# Altium PCB machdongho.PcbDoc
Units mm, origin at the board's own origin, x right, y up, seen from the top; angles counter-clockwise.
Board outline 65.41 x 52.07 mm, 2 copper layers (Top Layer, Bottom Layer); 46 components, 62 nets, 189 pads, 31 vias.
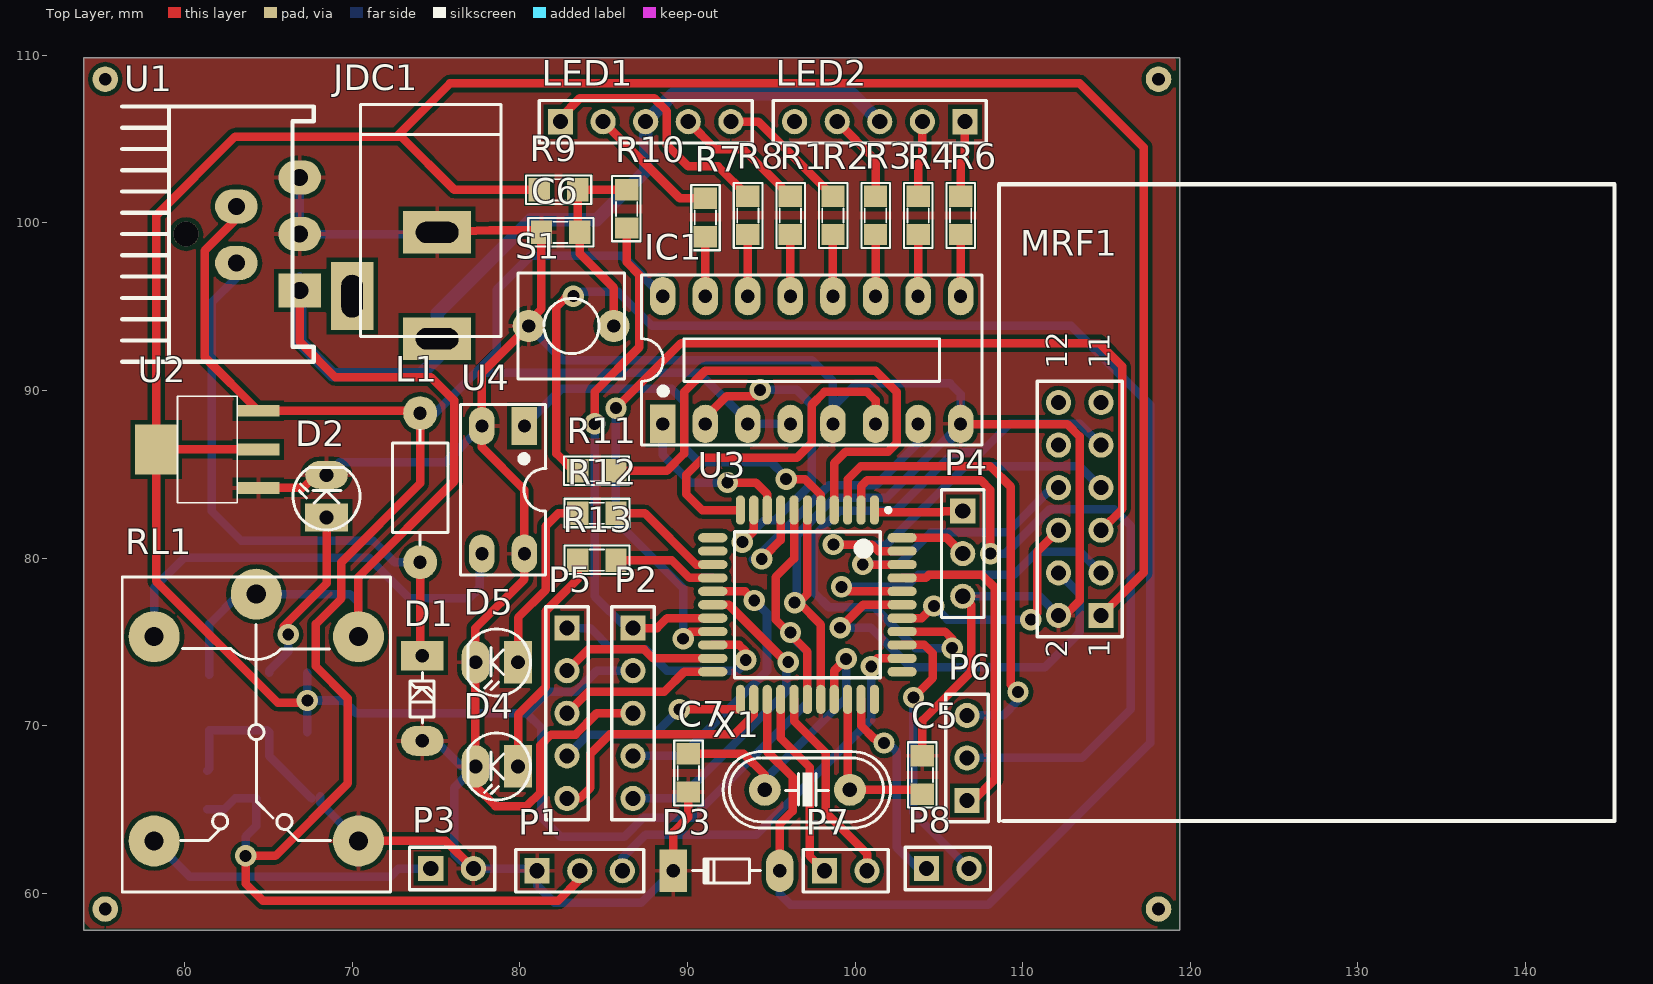
[diagram p0: Top Layer view]
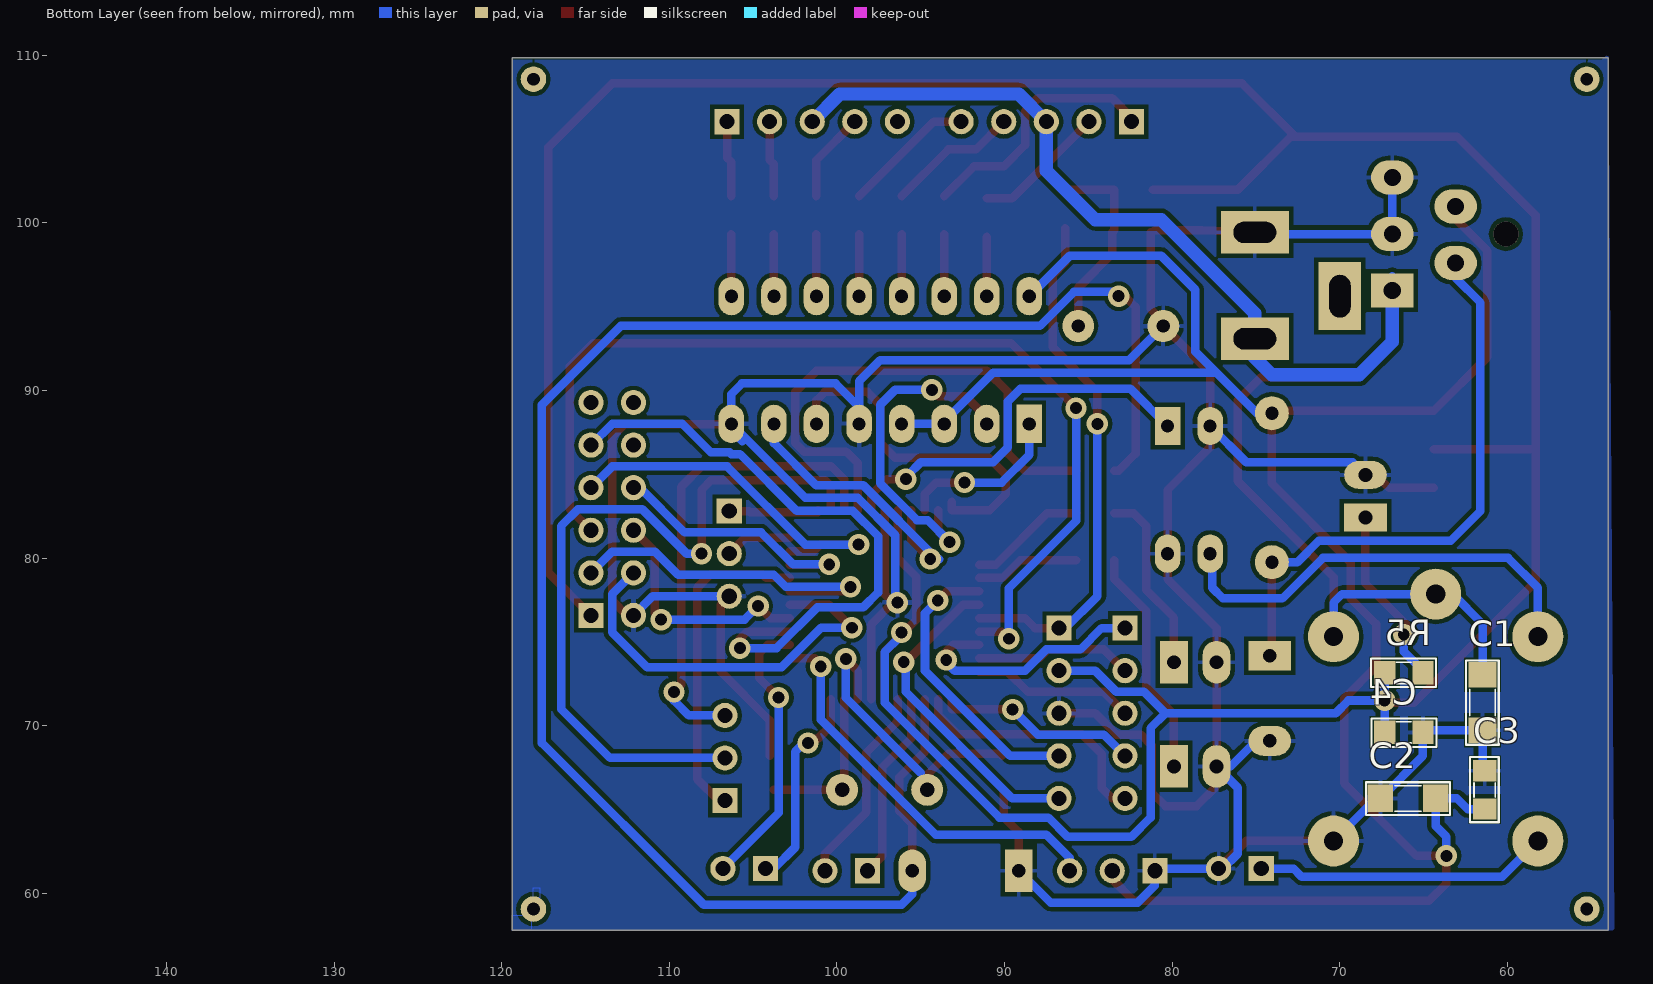
[diagram p1: Bottom Layer view, seen from below]
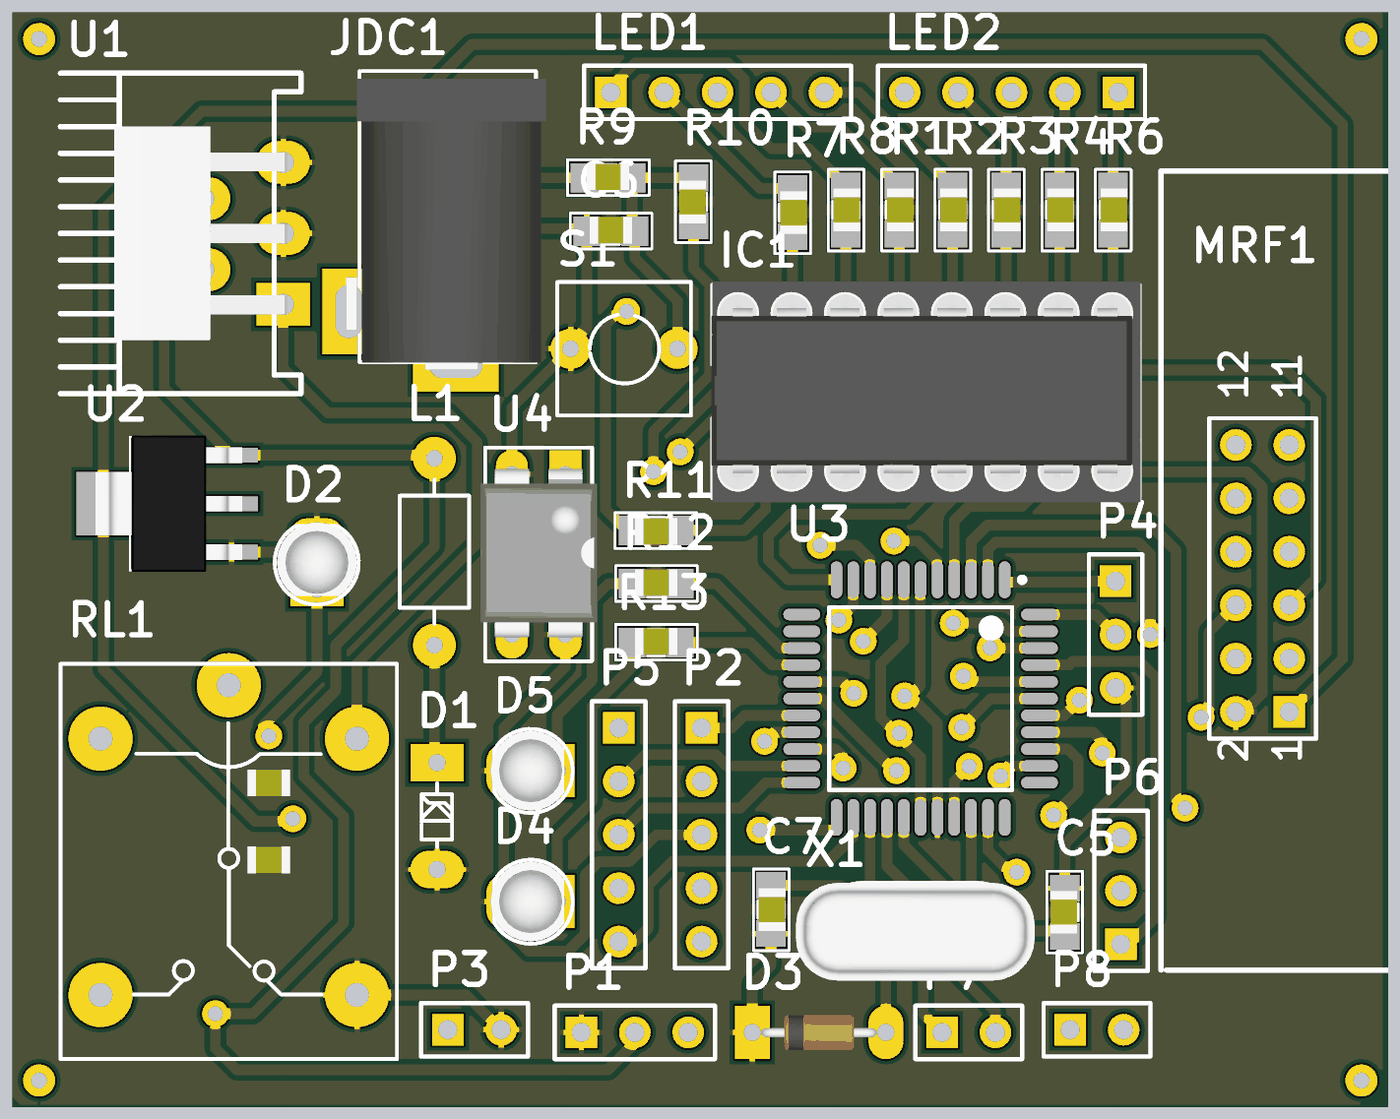
[diagram p2: 3D render of the assembled board from above, using the file's embedded part models]
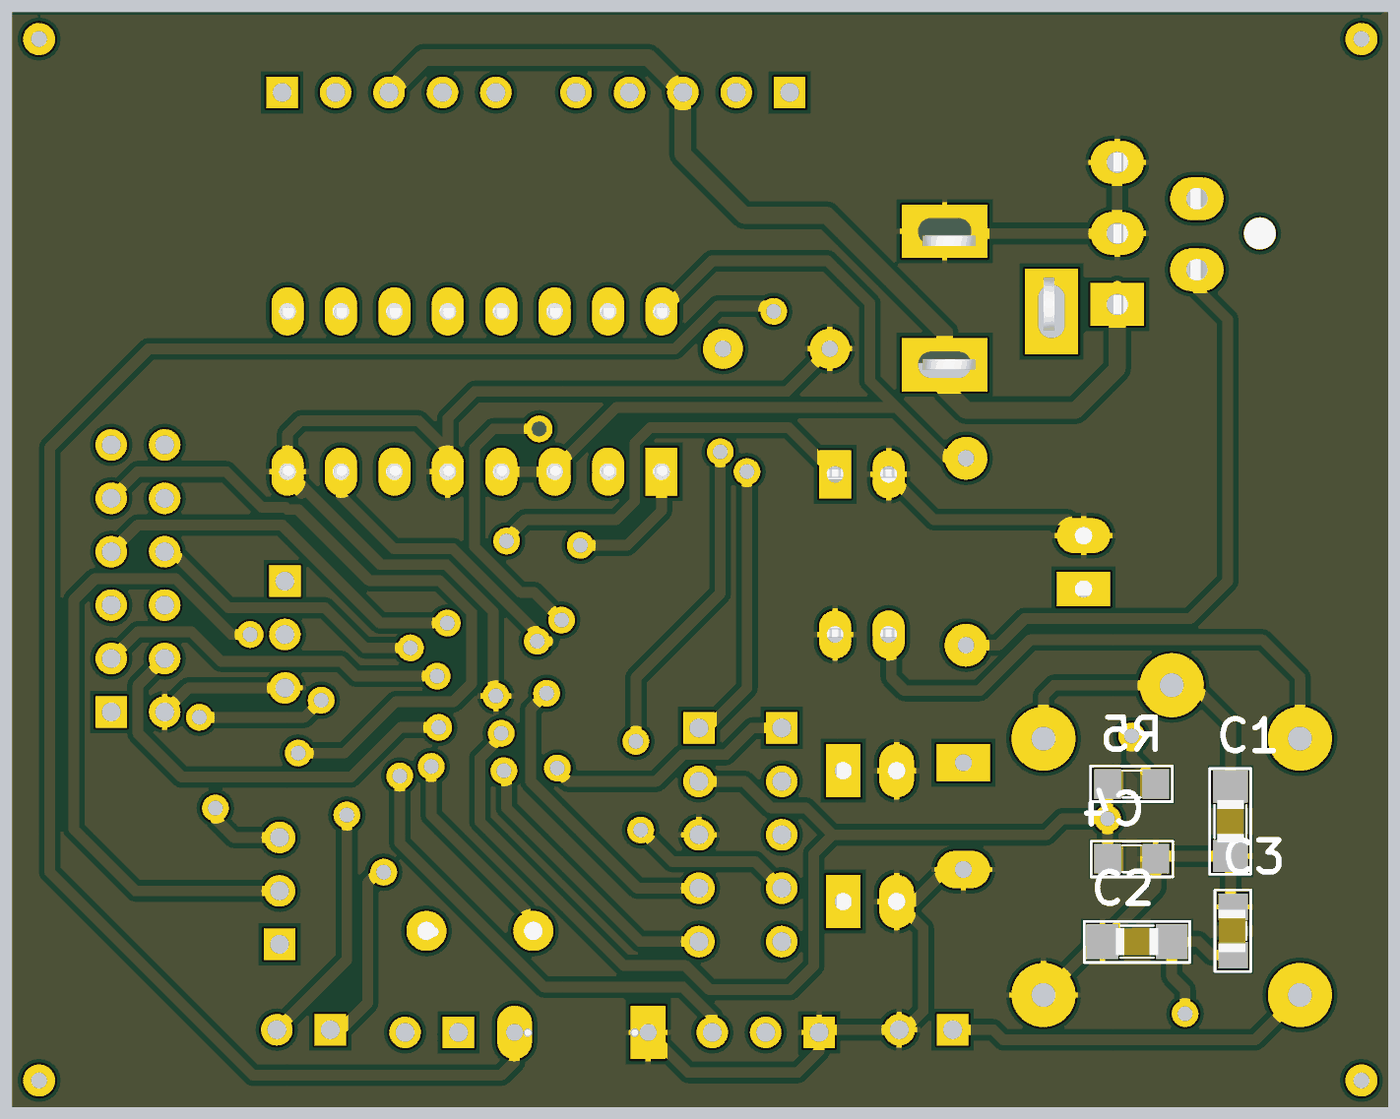
[diagram p3: 3D render of the assembled board from below, using the file's embedded part models]

## Layer stack, top to bottom
Top Solder: solder mask 0.0102, Solder Resist, Dk 3.5
Top Layer: signal copper 0.0356
Dielectric1: dielectric 0.32, FR-4, Dk 4.8
Bottom Layer: signal copper 0.0356
Bottom Solder: solder mask 0.0102, Solder Resist, Dk 3.5

## Board outline
53.975,109.855 53.975,57.785 119.38,57.785 119.38,109.855

## Design rules (kind name [scope] priority, off if disabled: settings)
Clearance [All] p1: gap=0.254
PolygonConnect [All] p1: connectstyle=Relief reliefconductorwidth=0.254 reliefentries=4 polygonreliefangle="90 Angle" airgapwidth=0.254
RoomDefinition machdongho [InComponentClass('machdongho')] p1: confinementstyle=ConfineIn formatcopy=TRUE lockcomponents=FALSE outline 178.943,26.924 503.301,26.924 503.301,68.072 178.943,68.072
RoutingVias [All] p1: holewidth=0.711 width=1.27 viastyle="Through Hole" minholewidth=0.711 minwidth=1.27 maxholewidth=0.711 maxwidth=1.27
SilkToSolderMaskClearance SilkscreenOverComponentPads [IsPad] p1: minsilkscreentomaskgap=0.254 clearancetoexposedcopper=TRUE
SolderMaskExpansion [All] p1: expansion=0.102
UnpouredPolygon [All] p1: allowunpoured=FALSE
Width Width_1 [All] p1: maxlimit=0.508 minlimit=0.508 preferedwidth=0.508
Width [InNet('12V')] p2: maxlimit=0.762 minlimit=0.762 preferedwidth=0.762
28 further rules are at their usual default settings.

## Components (designator, comment, footprint, x,y, rotation, side; value= is the part's Value field where it differs from the comment)
C1 "Cap" "SMD Capacistor 1206" 60.452,68.834 r90 bottom
C2 "Cap Pol1" "SMD Capacistor 1206" 63.373,66.675 r0 bottom
C3 "Cap" SM-0805 61.341,66.167 r270 bottom
C4 "Cap" SM-0805 66.167,69.596 r0 bottom
C5 "" SM-0805 104.013,67.056 r270 top
C6 "Cap" SM-0805 82.423,99.441 r180 top
C7 "" SM-0805 90.043,67.183 r90 top
D1 "1N5822" DZ0.5A 74.168,69.088 r270 top
D2 "LED0" LED-3 68.453,82.423 r90 top
D3 "Diode" D0.5A 92.329,61.341 r0 top
D4 "" LED-3 79.883,67.564 r180 top
D5 "" LED-3 79.883,73.787 r180 top
IC1 "7447" DIP16/W0.3 88.519,88.011 r0 top
JDC1 "Jac DC" DC-IN 72.517,96.266 r270 top
L1 "100mH" L/0.4 74.041,79.756 r90 top
LED1 "Led7" HDR1X5 82.423,106.045 r0 top
LED2 "Led7" HDR1X5 106.553,106.045 r180 top
MRF1 "Header 6X2" MRF24J40MB_board_mini 110.871,75.311 r0 top
P1 "DONG CO" HDR1X3 81.026,61.341 r0 top
P2 "MACH NAP" HDR1X5 86.741,75.819 r270 top
P3 "Lamp" HDR1X2 74.676,61.468 r0 top
P4 "UART" HDR1X3 106.426,82.804 r270 top
P5 "Header 5" HDR1X5 82.804,75.819 r270 top
P6 "Header 3" HDR1X3 106.68,65.532 r90 top
P7 "Header 2" HDR1X2 98.171,61.341 r0 top
P8 "Header 2" HDR1X2 104.267,61.468 r0 top
R1 "2.2K" SM-0805 96.139,100.457 r90 top
R2 "2.2K" SM-0805 98.679,100.457 r90 top
R3 "2.2K" SM-0805 101.219,100.457 r90 top
R4 "2.2K" SM-0805 103.759,100.457 r90 top
R5 "Res1" SM-0805 66.167,73.152 r180 bottom
R6 "2.2K" SM-0805 106.299,100.457 r90 top
R7 "2.2K" SM-0805 91.059,100.33 r90 top
R8 "2.2K" SM-0805 93.599,100.457 r90 top
R9 "" SM-0805 82.296,101.981 r180 top
R10 "Res Semi" SM-0805 86.36,100.838 r270 top
R11 "Res1" SM-0805 84.582,85.217 r0 top
R12 "Res1" SM-0805 84.582,82.677 r180 top
R13 "Res1" SM-0805 84.582,79.883 r180 top
RL1 "Relay 10A/12V" RL_SPDT_10A 64.262,77.851 r270 top
S1 "SW-PB" SW2 85.598,93.853 r180 top
U1 "LM2576T-5.0" LM2576t 62.611,99.314 r90 top
U2 "LM1117-3.3V" LM1117-SOP 63.119,86.487 r90 top
U3 "PIC18F46K20-I/PT" TQFP-PT44_N 97.155,77.216 r270 top
U4 "Opto TRIAC" DIP4/W0.3 80.264,87.884 r180 top
X1 "4Mhz" XT2 97.155,66.167 r0 top

## Footprints (in the part's own frame and the unit in brackets; to place one, negate y for a bottom-side part, rotate by r counter-clockwise, add the part's x,y. Pads: shape width x height; smd on the part's side, far side on the other; paste and mask are expansions set on the pad)
D0.5A [mil] "Diode muoi, W 80mil, L 300mil"
  oval 65x100 hole 32: 1(125,0)
  rect 65x100 hole 32: 2(-125,0)
  silkscreen extent -80,-30 80,28, body extent -108,-33 108,32, height 61
DC-IN [mil] "Jac DC input"
  rect 100x160 hole 50 slot 100 at 90 deg: 1(125,100) 2(-125,100)
  rect 160x100 hole 50 slot 100 at 0 deg: 3(25,-100)
  silkscreen extent -425,-80 120,250, body extent -410,-105 134,269, height 434
DIP4/W0.3 [mil] "4 PIN, W 300mil, Pin to pin 100mil"
  rect 60x90 hole 31: 1(0,0)
  oval 60x90 hole 31: 2(100,0) 3(100,300) 4(0,300)
  silkscreen extent -50,-50 150,350, body extent -59,-10 159,305, height 170
DIP16/W0.3 [mil] "16 PIN, W 300mil, Pin to pin 100mil"
  rect 60x90 hole 31: 1(0,0)
  oval 60x90 hole 31: 2(100,0) 3(200,0) 4(300,0) 5(400,0) 6(500,0) 7(600,0) 8(700,0) 9(700,300) 10(600,300) 11(500,300) 12(400,300) 13(300,300) 14(200,300) 15(100,300) 16(0,300)
  silkscreen extent -50,-50 750,350, body extent -52,-57 752,356, height 299
DZ0.5A [mil] "Diode Zenner, W 80mil, L 300mil"
  oval 70x100 hole 32: 1(0,0)
  rect 70x100 hole 32: 2(-200,0)
  silkscreen extent -161,-29 -42,28
HDR1X2 [mm] "Connector; Header; 2 Position"
  rect 1.5x1.5 hole 0.9: 1(0,0)
  round 1.5 hole 0.9: 2(2.54,0)
  silkscreen extent -1.27,-1.27 3.81,1.27
HDR1X3 [mm] "Connector; Header; 3 Position"
  rect 1.5x1.5 hole 0.9: 1(0,0)
  round 1.5 hole 0.9: 2(2.54,0) 3(5.08,0)
  silkscreen extent -1.27,-1.27 6.35,1.27
HDR1X5 [mm] "Connector; Header; 5 Position"
  rect 1.5x1.5 hole 0.9: 1(0,0)
  round 1.5 hole 0.9: 2(2.54,0) 3(5.08,0) 4(7.62,0) 5(10.16,0)
  silkscreen extent -1.27,-1.27 11.43,1.27
L/0.4 [mil] "Inductor , 2 Pin, L 350mil, W 150 mil"
  round 80 hole 31: 1(0,0) 2(350,0)
  silkscreen extent 40,-65 310,65
LED-3 [mil] "LED 2 PIN, 3ly Only colour"
  rect 65x100 hole 32: 1(0,0)
  oval 65x100 hole 32: 2(100,0)
  silkscreen extent -29,-78 118,79, body extent -13,-75 125,75, height 217
LM1117-SOP [mm]
  rect 0.7x2.54 smd: 1(-2.3,-1.27) 2(0,-1.27) 3(2.3,-1.27)
  rect 3x2.54 smd: 2(0,4.826)
  silkscreen extent -3.18,0 3.17,3.56, body extent -3.25,-1.78 3.25,5.18, height 1.68
LM2576t [mil]
  rect 80x100 hole 40: 1(-132,-167.09)
  oval 80x100 hole 40: 2(-67,-18) 3(1,-167) 4(66,-18) 5(134,-167)
  round 59.06 hole 59.06: ""(1,100)
  silkscreen extent -299,-200 301,250, body extent -199,-175 201,150, height 859
MRF24J40MB_board_mini [mm]
  rect 1.5x1.5 hole 0.9: 1(3.81,1.27)
  round 1.5 hole 0.9: 2(1.27,1.27) 3(3.81,3.81) 4(1.27,3.81) 5(3.81,6.35) 6(1.27,6.35) 7(3.81,8.89) 8(1.27,8.89) 9(3.81,11.43) 10(1.27,11.43) 11(3.81,13.97) 12(1.27,13.97)
  silkscreen extent -2.29,-11 34.45,27, body extent 0,0 5.08,15.24, height 7
RL_SPDT_10A [mil] "Relay SPDT, 5 pin, 10A,W 650mil, L 800mil, H 800mil"
  round 120 hole 45: 1(0,0) 2(580,240) 3(580,-240) 4(100,-240) 5(100,240)
  silkscreen extent -40,-315 700,315
SM-0805 [mil] "Compoment SMD 80x50mil"
  rect 50x55 smd: 1(-45,0) 2(45,0)
  silkscreen extent -77,-34 76,33, body extent -40,-27 40,23, height 24
"SMD Capacistor 1206" [mil]
  rect 60x65 smd: 1(35,40) 2(165,40)
  silkscreen extent 1,2 199,79, body extent 60,15 140,65, height 24
SW2 [mil] "SW button 2pin, 250x 250 mil"
  round 75 hole 31: 1(0,0) 2(200,0)
  silkscreen extent -25,-125 225,125
TQFP-PT44_N [mm] "Thin QFP, 44-Leads, Body 10x10mm, Pitch 0.8mm, IPC Medium Density"
  oval 1.75x0.55 smd: 1(-5.65,4) 2(-5.65,3.2) 3(-5.65,2.4) 4(-5.65,1.6) 5(-5.65,0.8) 6(-5.65,0) 7(-5.65,-0.8) 8(-5.65,-1.6) 9(-5.65,-2.4) 10(-5.65,-3.2) 11(-5.65,-4) 23(5.65,-4) 24(5.65,-3.2) 25(5.65,-2.4) 26(5.65,-1.6) 27(5.65,-0.8) 28(5.65,0) 29(5.65,0.8) 30(5.65,1.6) 31(5.65,2.4) 32(5.65,3.2) 33(5.65,4)
  oval 0.55x1.75 smd: 12(-4,-5.65) 13(-3.2,-5.65) 14(-2.4,-5.65) 15(-1.6,-5.65) 16(-0.8,-5.65) 17(0,-5.65) 18(0.8,-5.65) 19(1.6,-5.65) 20(2.4,-5.65) 21(3.2,-5.65) 22(4,-5.65) 34(4,5.65) 35(3.2,5.65) 36(2.4,5.65) 37(1.6,5.65) 38(0.8,5.65) 39(0,5.65) 40(-0.8,5.65) 41(-1.6,5.65) 42(-2.4,5.65) 43(-3.2,5.65) 44(-4,5.65)
  silkscreen extent -5.77,-4.35 4.35,4.95, body extent -5,-5 5,5, height 1.2
XT2 [mil] "Footpin for Crystal 2 pin"
  round 75 hole 34: 1(-100,0) 2(100,0)
  silkscreen extent -198,-90 195,90, body extent -233,-93 213,90, height 138

## Part data
C1 C3 C4 C6: "Capacitor"
C2: "Polarized Capacitor (Radial)"
C5 C7: library part Cap, "Capacitor"
D1: library part DZ, "Diode Zenner"
D2: "Typical INFRARED GaAs LED"
D3: "Default Diode"
D4 D5: library part LED0, "Typical INFRARED GaAs LED"
IC1: "BCD to 7-Segment Decoder/Driver"
JDC1: library part DCIN, "Jac DC input"
L1: library part L1, "Inductor"
LED1 LED2 P2: library part "Header 5", "Header, 5-Pin"
MRF1: "Header, 6-Pin, Dual row"
P1 P4: library part "Header 3", "Header, 3-Pin"
P3: library part "Header 2", "Header, 2-Pin"
P5: "Header, 5-Pin"
P6: "Header, 3-Pin"
P7 P8: "Header, 2-Pin"
R1 R2 R3 R4 R6 R7 R8: library part R, "Resistor 1/4W"
R5 R11 R12 R13: "Resistor"
R9: library part Res1, "Resistor"
R10: "Semiconductor Resistor"
RL1: library part "Relay 1", "Relay SPDT,10A - 12VDC 5 Pin"
S1: "Switch"
U1: "SIMPLE SWITCHER; 3A Step-Down Voltage Regulator"
U2: library part LM1117, "800mA Low-Dropout Linear Regulator"
U3: "Flash Microcontroller with 10-Bit A/D and nanoWatt Technology, 32K Flash, 44-Pin TQFP, Industrial Temperature Range"
U4: "Opto-Triac"
X1: library part XT2, "Crystal For all Crystal 2pin."

## Free pads (board coordinates)
  round 1.524 hole 0.762: 0(118.11,59.055) 1(118.11,108.585) 2(55.245,108.585) 3(55.245,59.055)

## Via types
v1: diameter 1.27, hole 0.711, Top Layer to Bottom Layer, 31 vias

## Nets (pads, with @x,y where several pads share a name; then routed paths per layer and width w, separated by ;. In a path a pad name is that pad's centre, name@x,y a point inside that pad or via, vN(x,y) a via of type N, cw(c..) or ccw(c..) an arc to the next point about the centre after c; other vN are vias at no path point)
3.3V: C4.2 MRF1.1 P2.2 R5.1 R9.2 U2.2 U3.7 U3.28 | length 210.1
  Top Layer w0.508: U2.2@64.389,86.487 U2.2@58.293,86.487 ; v1@67.437,71.374 65.532,71.374 58.293,78.613 U2.2@58.293,86.487 ; R9.2 76.073,101.981 72.898,105.156 72.644,105.156 ; U3.7 96.355,79.972 95.25,78.867 95.25,76.327 97.155,74.422 U3.28 ; MRF1.1 117.221,79.121 117.221,104.521 113.411,108.331 75.819,108.331 72.644,105.156 ; U2.2@58.293,86.487 58.293,100.457 62.992,105.156 72.644,105.156
  Bottom Layer w0.508: C4.2 v1(67.31,71.501) ; R5.1 v1(67.31,71.501) ; P2.2 84.583,73.279 83.325,72.021 81.673,72.021 80.391,70.739 ; v1@96.266,75.276 97.155,74.387 97.155,71.374 90.297,64.516 87.377,64.516 86.234,63.373 82.423,63.373 81.28,64.516 81.28,69.85 80.391,70.739 ; v1(67.31,71.501) 69.469,71.501 70.231,70.739 80.391,70.739
  other v1: 96.139,75.565
5V: C2.1 C3.2 IC1.3 IC1.4 IC1.16 L1.2 P1.2 U1.4 U2.3 | length 128.7
  Top Layer w0.508: U1.4 63.068,100.228 61.189,98.349 61.189,91.987 U2.3 L1.2@73.9,88.787 ; L1.2 74.041,84.455 69.342,79.756 69.342,77.597 67.818,76.073 67.818,73.533 69.723,71.628 69.723,66.548 65.405,62.23 v1(63.627,62.23) 63.627,60.579 64.643,59.563 82.296,59.563 83.566,60.833 P1.2
  Bottom Layer w0.508: C3.2 62.357,65.024 62.992,65.659 C2.1 64.262,64.008 63.627,63.373 v1(63.627,62.23) ; L1.2 74.93,88.646 77.343,91.059 ; IC1.16 86.106,98.044 80.645,98.044 78.613,96.012 78.613,92.329 77.343,91.059 ; IC1.4 IC1.3 93.599,88.138 90.678,91.059 77.343,91.059
12V: C1.2 JDC1.1 LED1.3 LED2.3 RL1.1 RL1.5 U1.1 | length 95.8
  Top Layer w0.508: U1.1@66.853,95.961 U1.1 66.855,92.911 68.961,90.805 74.676,90.805 76.073,89.408 76.073,84.582 70.358,78.867 RL1.5
  Bottom Layer w0.508: C1.2 61.468,76.073 63.246,77.851 RL1.1 69.85,77.851 70.358,77.343 RL1.5 ; U1.1@66.855,96.827 U1.1 U1.1@67.31,95.961
  Bottom Layer w0.8: U1.1 66.855,92.911 68.834,90.932 74.041,90.932 75.057,91.948 JDC1.1 75.057,94.615 80.645,100.203 84.582,100.203 87.503,103.124 LED1.3 89.154,107.696 99.822,107.696 LED2.3
A: LED1.4 R1.2 | length 7.9
  Top Layer w0.508: LED1.4 91.694,104.394 93.345,104.394 R1.2
A1: P5.1 U3.20 | length 14.8
  Top Layer w0.508: U3.20 93.078,74.816 93.472,74.422 v1(93.472,73.914)
  Bottom Layer w0.508: P5.1 84.201,75.819 85.471,74.549 87.503,74.549 88.773,73.279 92.964,73.279 93.472,73.787 v1@93.472,74.041
A2: P5.2 U3.21 | length 9.4
  Top Layer w0.508: P5.2 84.074,74.549 87.407,74.549 87.94,74.016 U3.21
A3: P5.3 U3.22 | length 9.7
  Top Layer w0.508: P5.3 84.074,72.009 88.595,72.009 89.802,73.216 U3.22
A4: P5.4 U3.23 | length 12.1
  Top Layer w0.508: v1(89.51,70.968) 93.155,70.968 U3.23
  Bottom Layer w0.508: P5.4 84.074,69.469 88.011,69.469 v1(89.51,70.968)
A5: P5.5 U3.24 | length 15.3
  Top Layer w0.508: P5.5 83.566,65.659 84.201,66.294 84.201,68.326 85.356,69.481 92.777,69.481 93.938,70.642 93.938,71.549 U3.24
AI: IC1.7 U3.8 | length 17.6
  Top Layer w0.508: v1@94.615,79.883 94.615,80.137 95.555,81.077 U3.8
  Bottom Layer w0.508: v1@93.899,79.945 v1@94.022,79.945 ; v1(94.426,79.945) v1@94.022,79.945 ; IC1.7 103.759,86.868 101.242,84.351 98.429,84.351 v1@94.022,79.945
AN5: D3.1 R11.1 U3.25 | length 108.3
  Top Layer w0.508: v1@83.185,95.885 83.058,95.885 82.169,94.996 82.169,86.233 83.185,85.217 R11.1 ; U3.25 94.755,68.44 96.266,66.929 96.266,64.897 95.504,64.135 D3.1
  Bottom Layer w0.508: v1@83.058,95.885 85.852,95.885 87.884,93.853 112.903,93.853 117.602,89.154 117.602,68.961 107.95,59.309 96.139,59.309 95.504,59.944 D3.1
  other v1: 83.185,95.631
B: LED1.5 R2.2 | length 7.9
  Top Layer w0.508: LED1.5 94.234,106.045 R2.2
BI: IC1.1 U3.9 | length 10
  Top Layer w0.508: v1(92.38,84.506) 94.069,84.506 94.755,83.82 U3.9
  Bottom Layer w0.508: IC1.1 88.519,86.157 90.17,84.506 v1(92.38,84.506)
C: LED2.4 R3.2 | length 5.4
  Top Layer w0.508: LED2.4 101.219,103.759 R3.2
C0: P8.1 U3.32 | length 12.4
  Top Layer w0.508: U3.32 100.355,70.002 101.142,69.215 v1@101.727,69.215
  Bottom Layer w0.508: v1@101.727,69.215 102.489,68.453 102.489,62.738 103.759,61.468 P8.1
  other v1: 101.727,68.961
C2: P8.2 U3.36 | length 16.8
  Top Layer w0.508: U3.36 104.14,74.816 104.648,74.308 104.648,72.848 v1(103.48,71.679)
  Bottom Layer w0.508: v1(103.48,71.679) 103.48,64.795 P8.2
CI: IC1.2 U3.10 | length 20.3
  Top Layer w0.508: IC1.2 91.059,88.392 92.329,89.662 93.955,89.662 v1(94.336,90.043) ; v1(93.269,80.95) 93.955,81.636 U3.10
  Bottom Layer w0.508: v1(93.269,80.95) 94.59,82.271 95.225,82.271 97.409,84.455 97.409,89.154 96.52,90.043 v1(94.336,90.043)
CS: MRF1.6 U3.38 | length 14.3
  Top Layer w0.508: U3.38 103.975,76.416 v1(104.699,77.14) ; v1(110.49,76.327) 110.871,76.708 110.871,80.391 MRF1.6
  Bottom Layer w0.508: v1(104.699,77.14) 105.512,76.327 v1(110.49,76.327)
D: LED2.2 R4.2 | length 4.6
  Top Layer w0.508: R4.2 103.759,103.505 104.013,103.759 LED2.2
D3: P6.1 U3.41 | length 19.9
  Top Layer w0.508: U3.41 104.216,78.816 104.394,78.994 107.569,78.994 108.331,78.232 108.331,66.802 107.061,65.532 P6.1 P6.1@106.934,65.786
D4: P6.2 U3.2 | length 44.9
  Top Layer w0.508: U3.2 100.355,84.29 100.711,84.646 107.505,84.646 108.077,84.074 v1@108.077,80.518
  Bottom Layer w0.508: P6.2 113.538,68.072 116.459,70.993 116.459,81.915 115.455,82.919 111.62,82.919 108.965,80.264 v1(108.077,80.264)
D5: P6.3 U3.3 | length 28.7
  Top Layer w0.508: U3.3 99.555,84.696 100.33,85.471 108.077,85.471 109.29,84.258 109.29,72.447 v1(109.728,72.009)
  Bottom Layer w0.508: P6.3 108.839,70.612 109.728,71.501 v1(109.728,72.009)
DI: IC1.6 U3.11 | length 21.6
  Top Layer w0.508: U3.11@93.155,83.363 U3.11 90.87,82.866 89.916,83.82 89.916,84.963 90.932,85.979 96.52,85.979 97.409,86.868 97.409,89.154 98.171,89.916 100.711,89.916 101.219,89.408 IC1.6
DIODE: R11.2 U3.4 | length 32
  Top Layer w0.508: R11.2 88.773,85.217 89.789,86.233 89.789,89.916 91.059,91.186 101.219,91.186 102.489,89.916 102.489,86.868 101.981,86.36 99.441,86.36 98.755,85.674 U3.4
E: LED2.1 R6.2 | length 4.6
  Top Layer w0.508: R6.2 106.299,103.632 106.553,103.886 LED2.1
E1: P7.1 U3.26 | length 11.3
  Top Layer w0.508: U3.26 95.555,69.253 97.282,67.526 97.282,62.23 P7.1
E2: P7.2 U3.27 | length 12
  Top Layer w0.508: U3.27 96.355,70.269 98.234,68.389 98.234,64.834 100.711,62.357 P7.2
F: LED1.2 R7.2 | length 8
  Top Layer w0.508: LED1.2 89.535,101.473 R7.2
G: LED1.1 R8.2 | length 15.5
  Top Layer w0.508: LED1.1 82.423,106.299 83.566,107.442 88.011,107.442 88.773,106.68 88.773,104.648 90.043,103.378 91.821,103.378 R8.2
GND: C1.1 C2.2 C3.1 C4.1 C5.1 C6.2 C7.1 D1.1 D2.2 D3.2 D4.2 D5.2 IC1.5 IC1.8 JDC1.2 MRF1.2 P1.1 P2.3 P3.2 P4.3 RL1.2 S1.2 U1.3 U1.5 U2.1 U3.6 U3.29 U4.2 U4.4 | length 232
  Top Layer w0.508: U2.1 67.042,84.187 67.818,84.963 D2.2 ; RL1.2 75.565,63.119 P3.2 ; JDC1.2 78.181,99.568 C6.2@81.026,99.568 ; D4.2 D5.2 77.343,75.819 80.264,78.74 U4.4 80.264,84.074 77.724,86.614 U4.2 77.724,91.059 S1.2 80.518,94.107 81.28,94.869 C6.2 ; D4.2@77.43,67.477 77.43,66.294 78.53,65.195 80.391,65.195 81.216,66.02 81.216,68.834 81.852,69.469 83.313,69.469 84.583,70.739 P2.3 ; D3.2 89.154,63.652 90.043,64.541 C7.1 ; U3.6 97.138,82.849 97.138,77.834 96.647,77.343 97.955,76.035 U3.29 ; C5.1 104.013,70.307 106.934,73.229 106.934,77.216 P4.3 ; IC1.8 106.311,87.999 112.662,87.999 113.399,87.262 113.399,77.458 MRF1.2@112.522,76.581
  Bottom Layer w0.508: C3.1 61.468,67.437 C1.1 64.897,69.723 C4.1 65.024,68.199 C2.2 ; U1.5 U1.3 JDC1.2@74.955,99.339 ; C2.2@68.072,65.786 68.072,65.405 RL1.2 ; 69.215,85.725 75.565,85.725 U4.2 ; D1.1 74.981,69.088 76.505,67.564 D4.2 76.073,66.294 76.073,62.357 76.962,61.468 P3.2 80.899,61.468 P1.1 81.026,60.452 82.042,59.436 87.249,59.436 D3.2 ; S1.2 82.55,91.821 97.409,91.821 98.679,90.551 IC1.5@98.679,89.027 ; v1@96.52,77.343 96.52,81.365 98.744,83.589 101.877,83.589 IC1.8 ; IC1.5 IC1.5@98.679,89.027 ; 105.639,86.97 106.299,87.63 IC1.8 ; P4.3 110.998,77.724 MRF1.2 ; IC1.5@98.679,89.027 100.076,90.424 105.664,90.424 106.299,89.789 IC1.8
  other v1: 96.393,77.343
INT: MRF1.5 U3.19 | length 60.1
  Top Layer w0.508: v1(85.725,88.951) 89.611,92.837 114.554,92.837 115.951,91.44 115.951,82.931 MRF1.5 ; v1(89.738,75.184) 90.17,75.616 U3.19
  Bottom Layer w0.508: v1(85.725,88.951) 85.725,82.22 89.738,78.207 v1(89.738,75.184)
LAMP: P3.1 RL1.3 | length 17.6
  Bottom Layer w0.508: RL1.3 60.3,60.985 72.263,60.985 72.746,61.468 P3.1
LED1: R12.1 U3.14 | length 7
  Top Layer w0.508: R12.1 87.452,82.677 90.513,79.616 U3.14
LED2: R13.1 U3.15 | length 6.2
  Top Layer w0.508: R13.1 89.052,79.883 90.119,78.816 U3.15
MCLR: P2.1 R10.2 U3.18 | length 31.7
  Top Layer w0.508: v1@84.455,87.757 84.455,89.916 87.122,92.583 87.122,96.901 86.36,97.663 R10.2 ; P2.1 88.186,75.819 88.783,76.416 U3.18
  Bottom Layer w0.508: v1(84.455,88.011) 84.455,77.724 86.36,75.819 P2.1
NetC6_1: C6.1 R9.1 R10.1 S1.1 | length 11.9
  Top Layer w0.508: S1.1 85.598,96.139 83.566,98.171 C6.1 83.439,99.568 R9.1 R10.1
NetD1_2: D1.2 L1.1 U1.2 | length 34.8
  Top Layer w0.508: L1.1 74.041,74.168 D1.2
  Bottom Layer w0.508: U1.2 63.068,96.723 61.595,95.25 61.595,82.804 63.373,81.026 71.247,81.026 72.517,79.756 L1.1
NetD2_1: D2.1 R5.2 | length 10.7
  Top Layer w0.508: v1@65.913,75.565 65.913,75.946 68.453,78.486 D2.1
  Bottom Layer w0.508: R5.2 65.024,73.279 66.167,74.422 v1(66.167,75.438)
NetD4_1: D4.1 R13.2 | length 13.8
  Top Layer w0.508: D4.1 79.883,70.663 81.534,72.314 81.534,76.835 83.439,78.74 R13.2
NetD5_1: D5.1 R12.2 | length 11
  Top Layer w0.508: D5.1 79.883,76.446 81.534,78.097 81.534,81.915 82.296,82.677 R12.2
NetIC1_9: IC1.9 R6.1 | length 3.7
  Top Layer w0.508: IC1.9 R6.1
NetIC1_10: IC1.10 R4.1 | length 3.7
  Top Layer w0.508: IC1.10 R4.1
NetIC1_11: IC1.11 R3.1 | length 3.7
  Top Layer w0.508: IC1.11 R3.1
NetIC1_12: IC1.12 R2.1 | length 3.7
  Top Layer w0.508: IC1.12 R2.1
NetIC1_13: IC1.13 R1.1 | length 3.7
  Top Layer w0.508: IC1.13 R1.1
NetIC1_14: IC1.14 R8.1 | length 3.7
  Top Layer w0.508: IC1.14 R8.1
NetIC1_15: IC1.15 R7.1 | length 3.6
  Top Layer w0.508: IC1.15 R7.1
OPTO: U3.5 U4.1 | length 23.5
  Top Layer w0.508: v1(95.885,84.709) 97.019,84.709 97.938,83.79 97.938,82.883 U3.5
  Bottom Layer w0.508: U4.1 82.482,90.102 89.051,90.102 89.789,89.364 89.789,86.614 90.678,85.725 94.996,85.725 v1@95.758,84.963
OSC1: C7.2 U3.30 X1.1 | length 16.7
  Top Layer w0.508: C7.2@90.17,68.199 C7.2 93.345,68.326 X1.1@94.615,67.056 ; U3.30 98.755,73.279 v1(99.466,73.99)
  Bottom Layer w0.508: 94.996,67.183 99.466,71.653 v1(99.466,73.99)
OSC2: C5.2 U3.31 X1.2 | length 9.3
  Top Layer w0.508: X1.2@99.555,66.307 U3.31 ; X1.2 C5.2@103.759,66.167
PGC: P2.4 U3.16 | length 17.5
  Top Layer w0.508: U3.16 93.434,78.016 v1@94.107,77.343
  Bottom Layer w0.508: P2.4 89.662,68.199 94.742,73.279 94.742,76.708 v1(93.98,77.47)
PGD: P2.5 U3.17 | length 19.6
  Top Layer w0.508: U3.17 92.456,77.216 v1@96.012,73.66
  Bottom Layer w0.508: P2.5 89.535,65.659 95.885,72.009 95.885,73.66 v1(96.012,73.787)
PWM: P1.3 U3.35 | length 24.3
  Top Layer w0.508: v1@100.965,73.66 101.321,74.016 U3.35
  Bottom Layer w0.508: P1.3 86.106,62.103 87.503,63.5 94.107,63.5 100.965,70.358 v1@100.965,73.66
  other v1: 100.965,73.533
RELAY: RL1.4 U4.3 | length 26.3
  Bottom Layer w0.508: RL1.4 58.166,78.232 59.944,80.01 70.993,80.01 73.406,77.597 76.962,77.597 77.597,78.232 U4.3@77.597,80.137
RSTMRF: MRF1.3 U3.40 | length 20.6
  Top Layer w0.508: v1(99.187,78.283) 99.454,78.016 U3.40
  Bottom Layer w0.508: v1(99.187,78.283) 103.048,78.283 103.759,78.994 109.472,78.994 110.869,80.391 113.411,80.391 MRF1.3
SCK: MRF1.9 U3.37 | length 37.1
  Top Layer w0.508: U3.37 105.359,75.616 105.791,75.184 v1(105.791,74.625)
  Bottom Layer w0.508: v1(105.791,74.625) 103.599,74.625 101.161,77.064 98.425,77.064 97.545,77.944 97.545,81.312 99.06,82.827 102.41,82.827 105.791,86.208 106.299,86.208 106.401,86.309 107.518,86.309 109.22,88.011 113.411,88.011 MRF1.9
SDI: MRF1.8 U3.42 | length 16.4
  Top Layer w0.508: v1@100.47,79.616 U3.42
  Bottom Layer w0.508: v1(100.457,79.629) 102.616,79.629 104.521,81.534 109.093,81.534 111.76,84.201 MRF1.8 MRF1.8@111.804,83.864
SDO: MRF1.7 U3.43 | length 22.7
  Top Layer w0.508: v1(98.704,80.806) 100.99,80.806 101.381,80.416 U3.43
  Bottom Layer w0.508: v1(98.704,80.806) 101.888,80.806 106.553,85.471 113.411,85.471 MRF1.7
URX: P4.1 U3.1 | length 5.4
  Top Layer w0.508: U3.1 101.155,82.749 105.169,82.749 105.224,82.804 P4.1
UTX: P4.2 U3.44 | length 4
  Top Layer w0.508: U3.44 105.474,81.216 P4.2
WAKE: MRF1.4 U3.39 | length 24.5
  Top Layer w0.508: v1(99.111,75.844) 100.482,77.216 U3.39
  Bottom Layer w0.508: v1(99.111,75.844) 100.94,75.844 103.302,73.482 111.328,73.482 113.411,75.565 113.411,77.851 MRF1.4
"": 
pads on no net: JDC1.3 LED2.5 MRF1.10 MRF1.11 MRF1.12 U1. U3.12 U3.13 U3.33 U3.34

## Polygon pours and split planes (outlines as drawn)
GND on Bottom Layer "Top Layer-No Net" (solid, pour order 6): 53.975,110.109 54.356,109.728 119.38,109.728 119.38,57.912 119.634,57.658 119.507,57.785 53.594,57.785
GND on Bottom Layer "Bottom Layer-No Net" (solid, shelved, pour order 2): 118.11,59.69 118.11,60.325 117.729,60.325 117.729,59.69
GND on Bottom Layer "Bottom Layer-No Net" (solid, shelved, pour order 9): 118.237,58.674 118.237,57.785 119.38,57.785 119.38,58.672 119.378,58.674
GND on Top Layer "Top Layer-No Net" (solid, pour order 4): 53.975,109.855 119.253,109.855 119.507,110.109 119.126,109.728 119.126,57.912 54.356,57.912 53.975,58.293

## Text inside footprints (layer, text, board x,y; h text height)
MRF1: Top Overlay "2" at 112.649,74.041 h1.27 r90; Top Overlay "1" at 115.189,74.041 h1.27 r90; Top Overlay "1" at 115.189,91.313 h1.27 r90; Top Overlay "1" at 115.189,92.329 h1.27 r90; Top Overlay "12" at 112.649,91.313 h1.27 r90